# Altium PCB VGA breakout.PcbDoc
Units mm, origin at the board's own origin, x right, y up, seen from the top; angles counter-clockwise.
Board outline 152.4 x 101.6 mm, 2 copper layers (Top Layer, Bottom Layer); 5 components, 9 nets, 29 pads, 0 vias.
Unrouted connection lines stored in the file: 1.
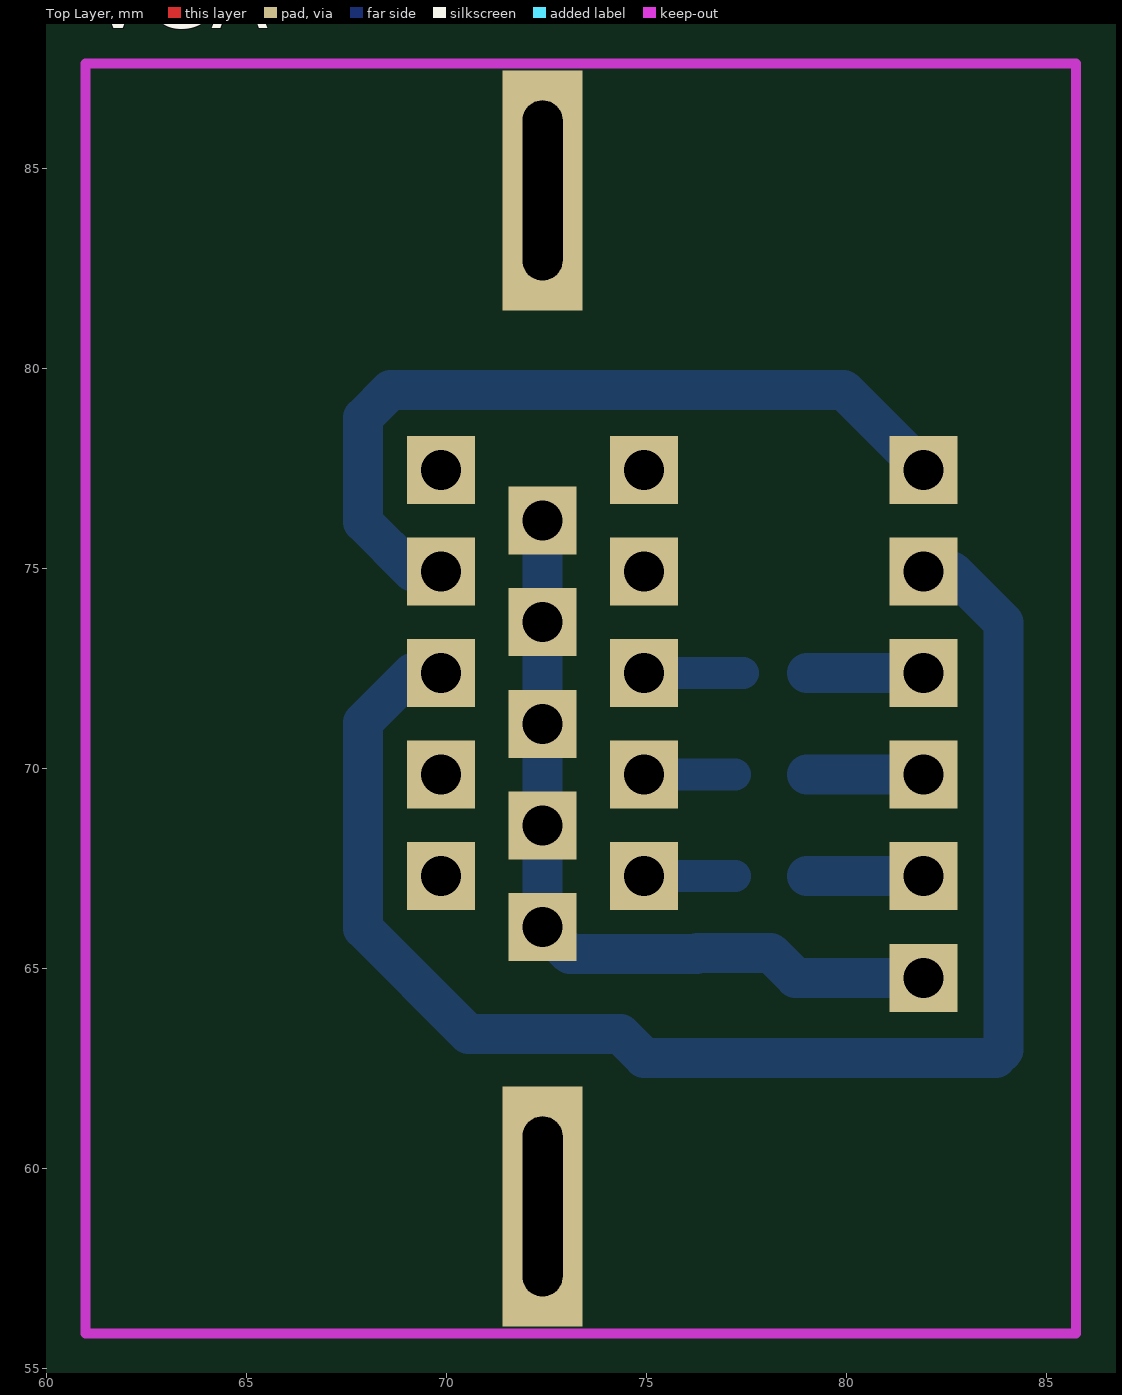
[diagram p0: Top Layer view]
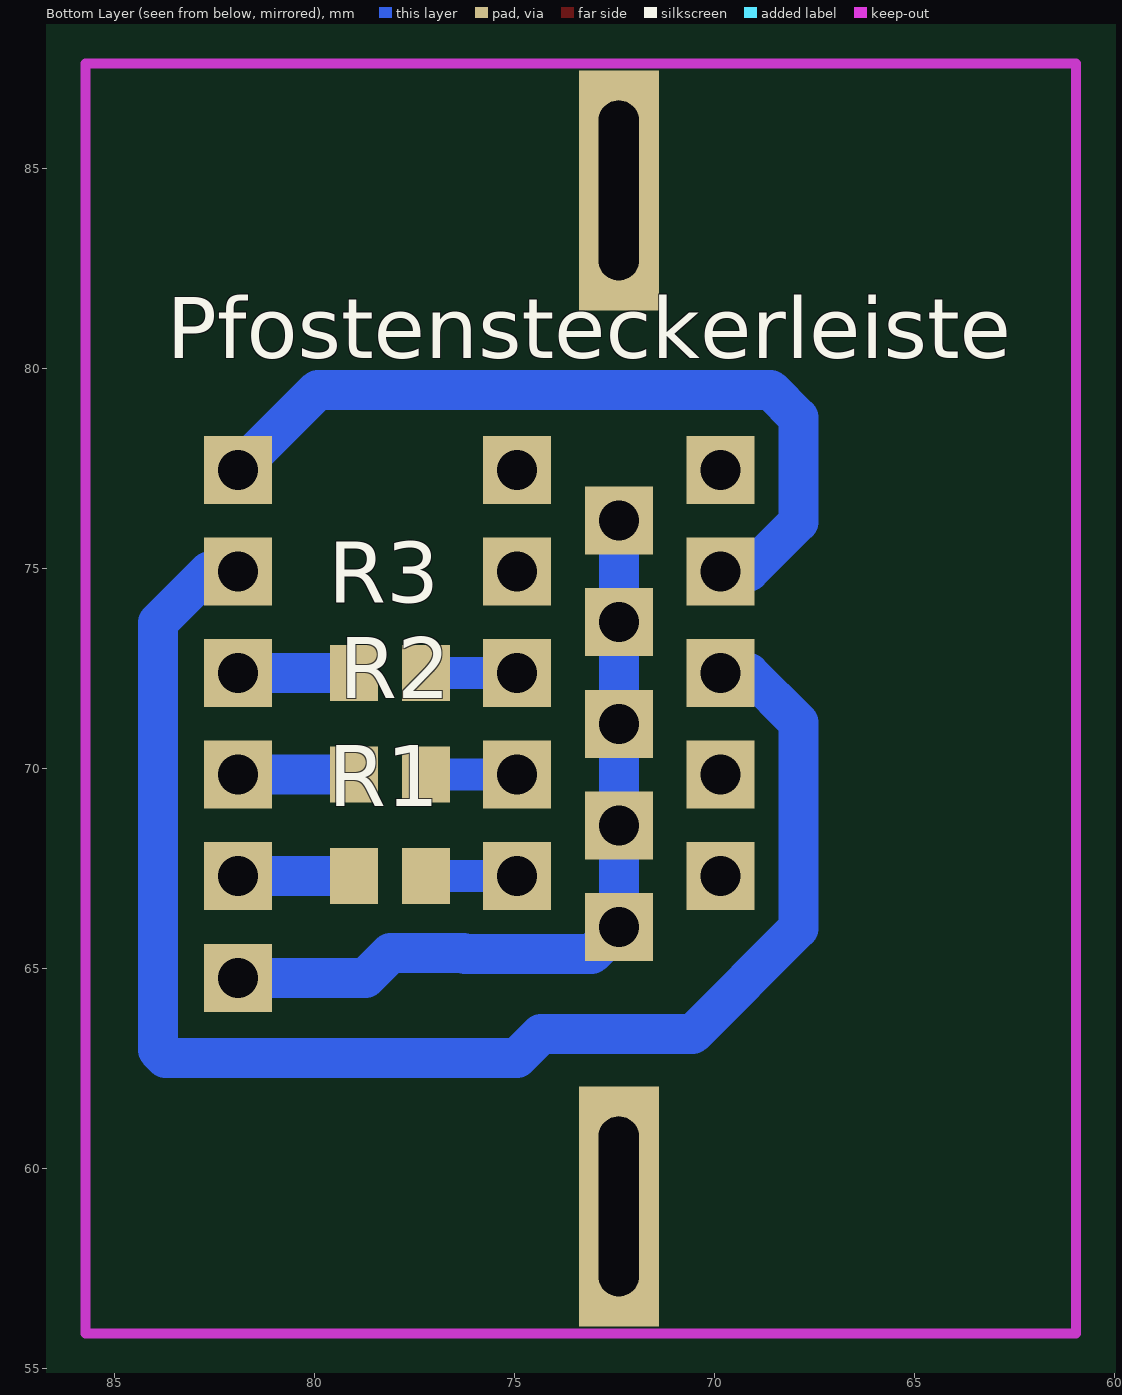
[diagram p1: Bottom Layer view, seen from below]
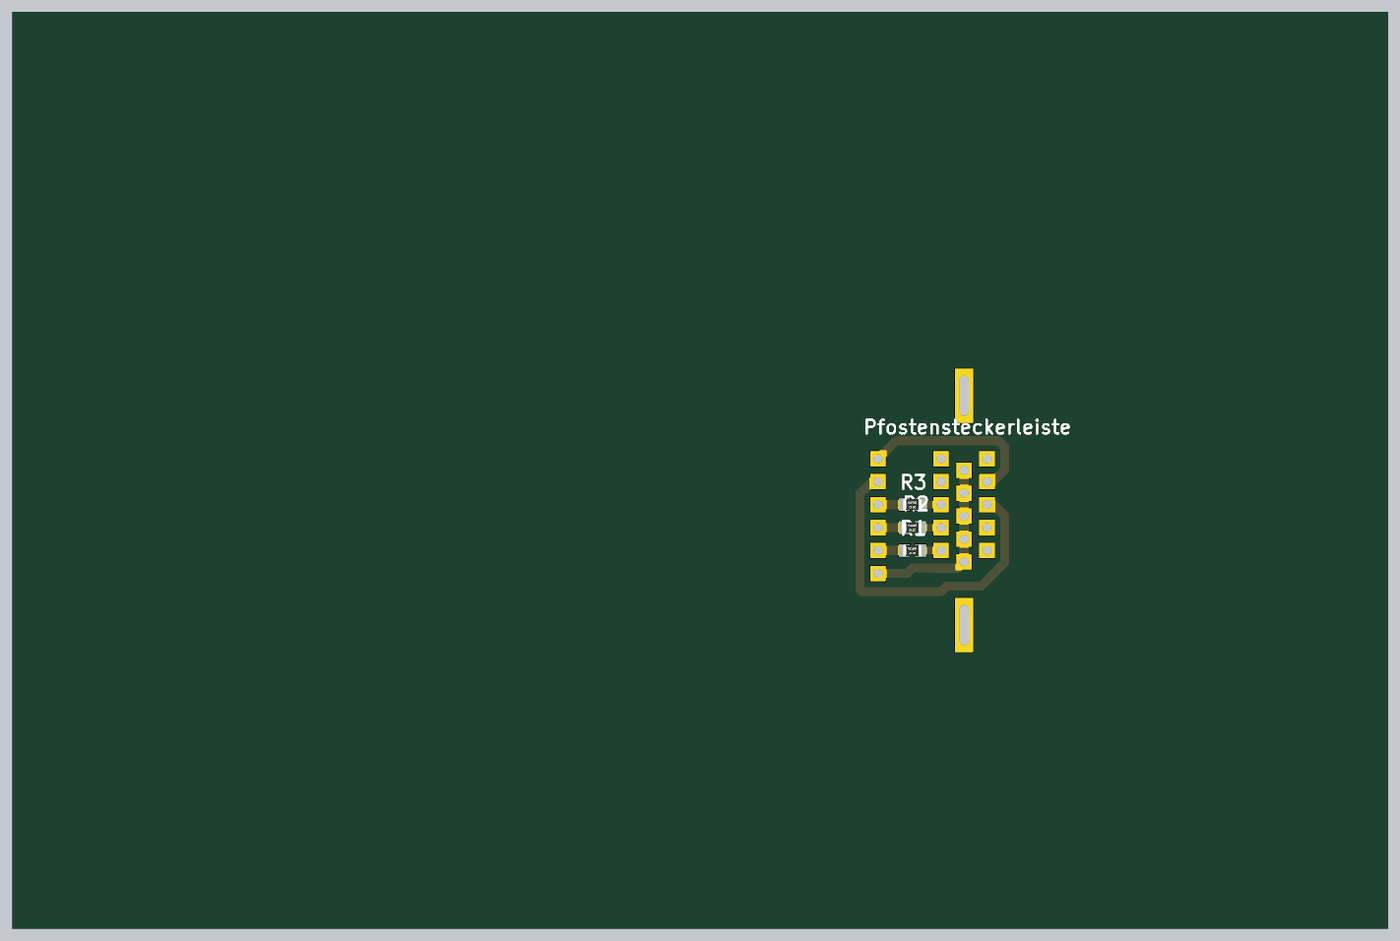
[diagram p2: 3D render of the assembled board from below, using the file's embedded part models]

## Layer stack, top to bottom
Top Solder: solder mask 0.0102, Solder Resist, Dk 3.5
Top Layer: signal copper 0.0356
Dielectric 1: dielectric 0.32, FR-4, Dk 4.8
Bottom Layer: signal copper 0.0356
Bottom Solder: solder mask 0.0102, Solder Resist, Dk 3.5

## Board outline
25.4,25.4 177.8,25.4 177.8,127 25.4,127

## Design rules (kind name [scope] priority, off if disabled: settings)
Clearance [All] p1: gap=0.6 except(1: Arc-Track Track-Track)
PolygonConnect [All] p1: connectstyle=Relief reliefconductorwidth=0.254 reliefentries=4 polygonreliefangle="90 Angle" airgapwidth=0.254
RoutingVias [All] p1: holewidth=0.711 width=1.27 viastyle="Through Hole" minholewidth=0.711 minwidth=1.27 maxholewidth=0.711 maxwidth=1.27
SilkToBoardRegionClearance [All] p1 off:
SilkToSilkClearance [All] p1 off: silktosilkclearance=0.254
SilkToSolderMaskClearance [IsPad] p1 off: minsilkscreentomaskgap=0.254 clearancetoexposedcopper=TRUE
SolderMaskExpansion [All] p1: expansion=0.102
UnpouredPolygon [All] p1: allowunpoured=FALSE
Width [All] p1: maxlimit=3 minlimit=0.8 preferedwidth=1
26 further rules are at their usual default settings.

## Components (designator, comment, footprint, x,y, rotation, side; value= is the part's Value field where it differs from the comment)
Pfostensteckerleiste "Header 3x2" "Header 6x1" 81.915,74.93 r90 bottom
R1 "120R" "Resistor 0805" 78.105,67.31 r0 bottom
R2 "120R" "Resistor 0805" 78.105,69.85 r0 bottom
R3 "120R" "Resistor 0805" 78.105,72.39 r0 bottom
VGA "VGA header DSUB15" "D-Sub 15" 72.39,71.12 r90 top

## Footprints (in the part's own frame and the unit in brackets; to place one, negate y for a bottom-side part, rotate by r counter-clockwise, add the part's x,y. Pads: shape width x height; smd on the part's side, far side on the other; paste and mask are expansions set on the pad)
"D-Sub 15" [mm] "VGA connector"
  rect 1.7x1.7 hole 1: 1(-3.81,-2.54) 2(-1.27,-2.54) 3(1.27,-2.54) 4(3.81,-2.54) 5(6.35,-2.54) 6(-5.08,0) 7(-2.54,0) 8(0,0) 9(2.54,0) 10(5.08,0) 11(-3.81,2.54) 12(-1.27,2.54) 13(1.27,2.54) 14(3.81,2.54) 15(6.35,2.54)
  rect 6x2 hole 1 slot 4.5 at 0 deg: 16(-12.065,0) 17(13.335,0)
"Header 6x1" [mm]
  rect 1.7x1.7 hole 1: 1(-10.16,0) 2(-7.62,0) 3(-5.08,0) 4(-2.54,0) 5(0,0) 6(2.54,0)
"Resistor 0805" [mm] "Resistor 0805 / 2012 (2.0 x 1.2 mm)"
  rect 1.2x1.4 smd: 1(-0.9,0) 2(0.9,0)
  body extent -1,-0.63 1,0.62, height 0.45

## Part data
R1 R2 R3: library part Resistor

## Nets (pads, with @x,y where several pads share a name; then routed paths per layer and width w, separated by ;. In a path a pad name is that pad's centre, name@x,y a point inside that pad or via, vN(x,y) a via of type N, cw(c..) or ccw(c..) an arc to the next point about the centre after c; other vN are vias at no path point)
NetPfostensteckerleiste_1: Pfostensteckerleiste.1 VGA.5 VGA.6 VGA.7 VGA.8 VGA.9 VGA.10 | length 20.2
  Bottom Layer w1: VGA.10 VGA.9 VGA.8 VGA.7 VGA.6 73.07,65.36 76.236,65.36 76.269,65.393 78.093,65.393 78.717,64.77 Pfostensteckerleiste.1
NetPfostensteckerleiste_2: Pfostensteckerleiste.2 R1.2 | length 2.9
  Bottom Layer w1: R1.2 Pfostensteckerleiste.2
NetPfostensteckerleiste_3: Pfostensteckerleiste.3 R2.2 | length 2.9
  Bottom Layer w1: R2.2 Pfostensteckerleiste.3
NetPfostensteckerleiste_4: Pfostensteckerleiste.4 R3.2 | length 2.9
  Bottom Layer w1: R3.2 Pfostensteckerleiste.4
NetPfostensteckerleiste_5: Pfostensteckerleiste.5 VGA.13 | length 38.3
  Bottom Layer w1: VGA.13 69.134,72.39 67.9,71.156 67.9,66.004 70.544,63.36 74.34,63.36 74.93,62.77 83.725,62.77 83.915,62.96 83.915,73.646 82.631,74.93 Pfostensteckerleiste.5
NetPfostensteckerleiste_6: Pfostensteckerleiste.6 VGA.14 | length 20.2
  Bottom Layer w1: VGA.14 69.134,74.93 67.9,76.164 67.9,78.776 68.594,79.47 79.915,79.47 Pfostensteckerleiste.6
NetR1_1: R1.1 VGA.1 | length 2.3
  Bottom Layer w0.8: VGA.1 R1.1
NetR2_1: R2.1 VGA.2 | length 2.3
  Bottom Layer w0.8: VGA.2 R2.1
NetR3_1: R3.1 VGA.3 | length 2.5
  Bottom Layer w0.8: VGA.3 R3.1 R3.1@77.405,72.39
pads on no net: VGA.4 VGA.11 VGA.12 VGA.15 VGA.16 VGA.17

## Keep-outs
Keep-Out Layer:
  lines w0.254: 60.96,55.88 85.725,55.88 85.725,87.63 60.96,87.63 60.96,55.88